# Altium PCB 新控制图.PcbDoc
Units mil, origin at the board's own origin, x right, y up, seen from the top; angles counter-clockwise.
Board outline 6000 x 4000 mil, 2 copper layers (Top Layer, Bottom Layer); 40 components, 61 nets, 219 pads, 43 vias.
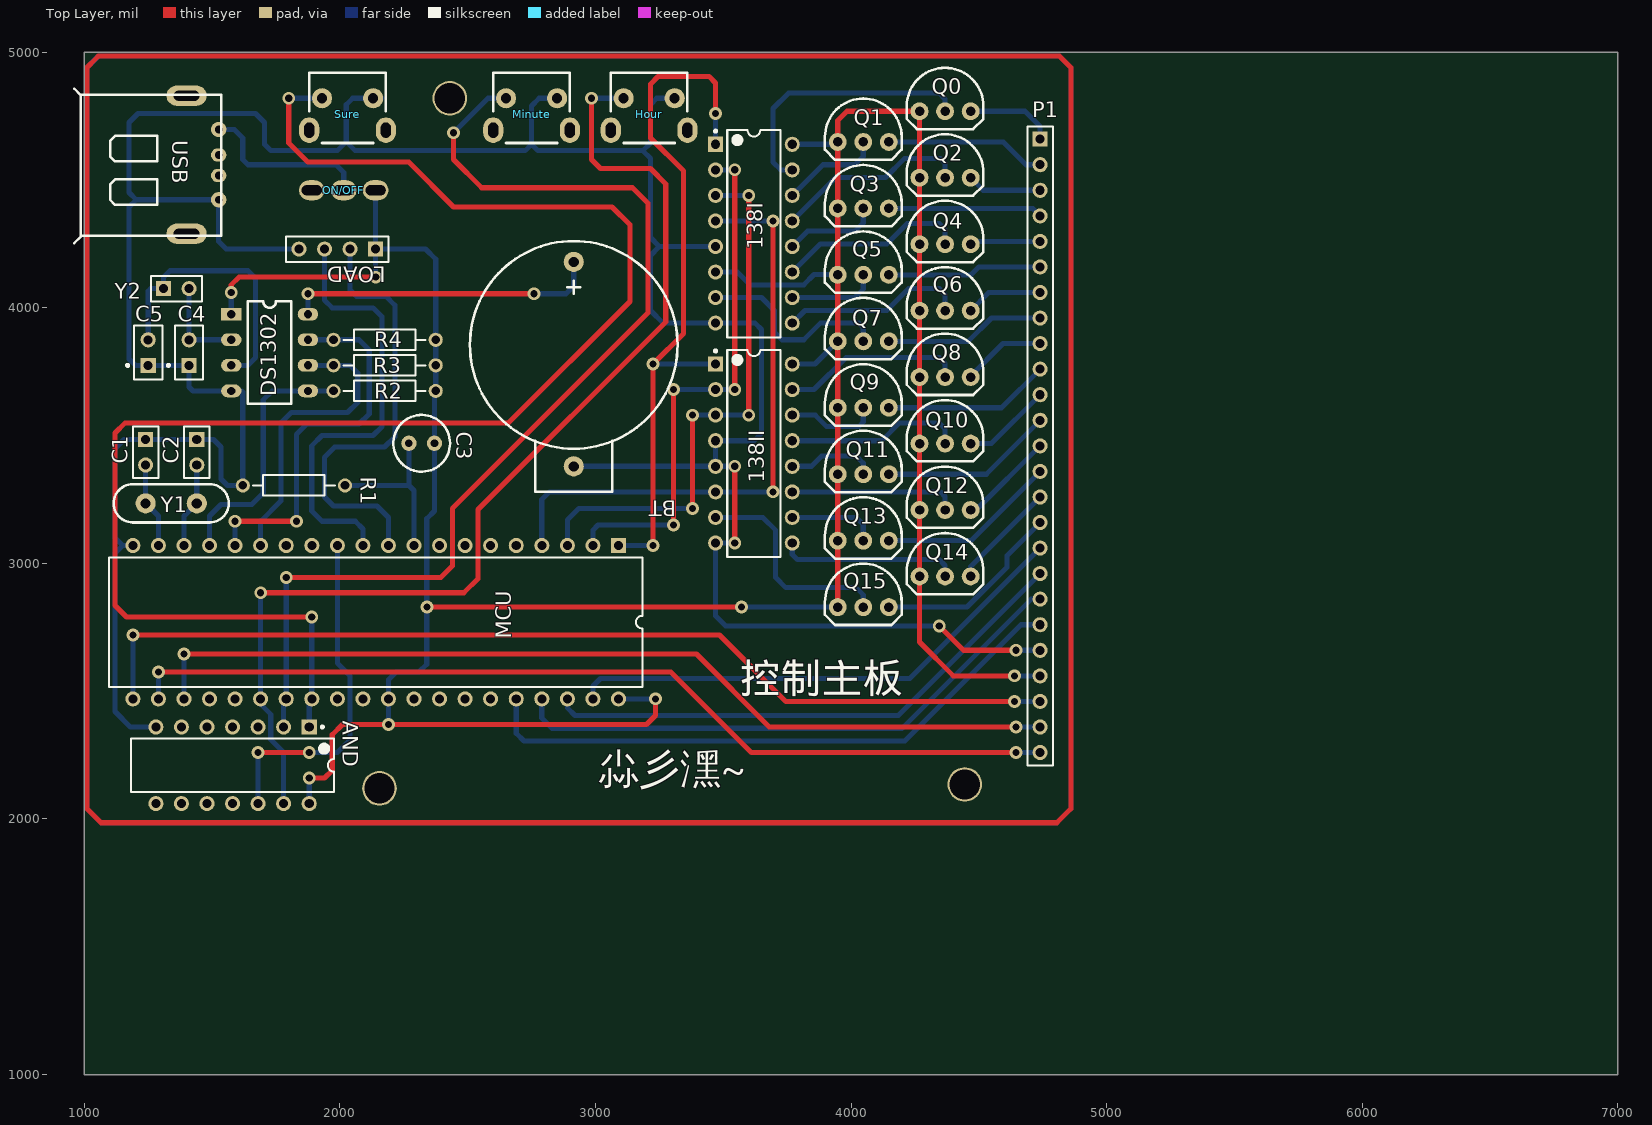
[diagram p0: Top Layer view]
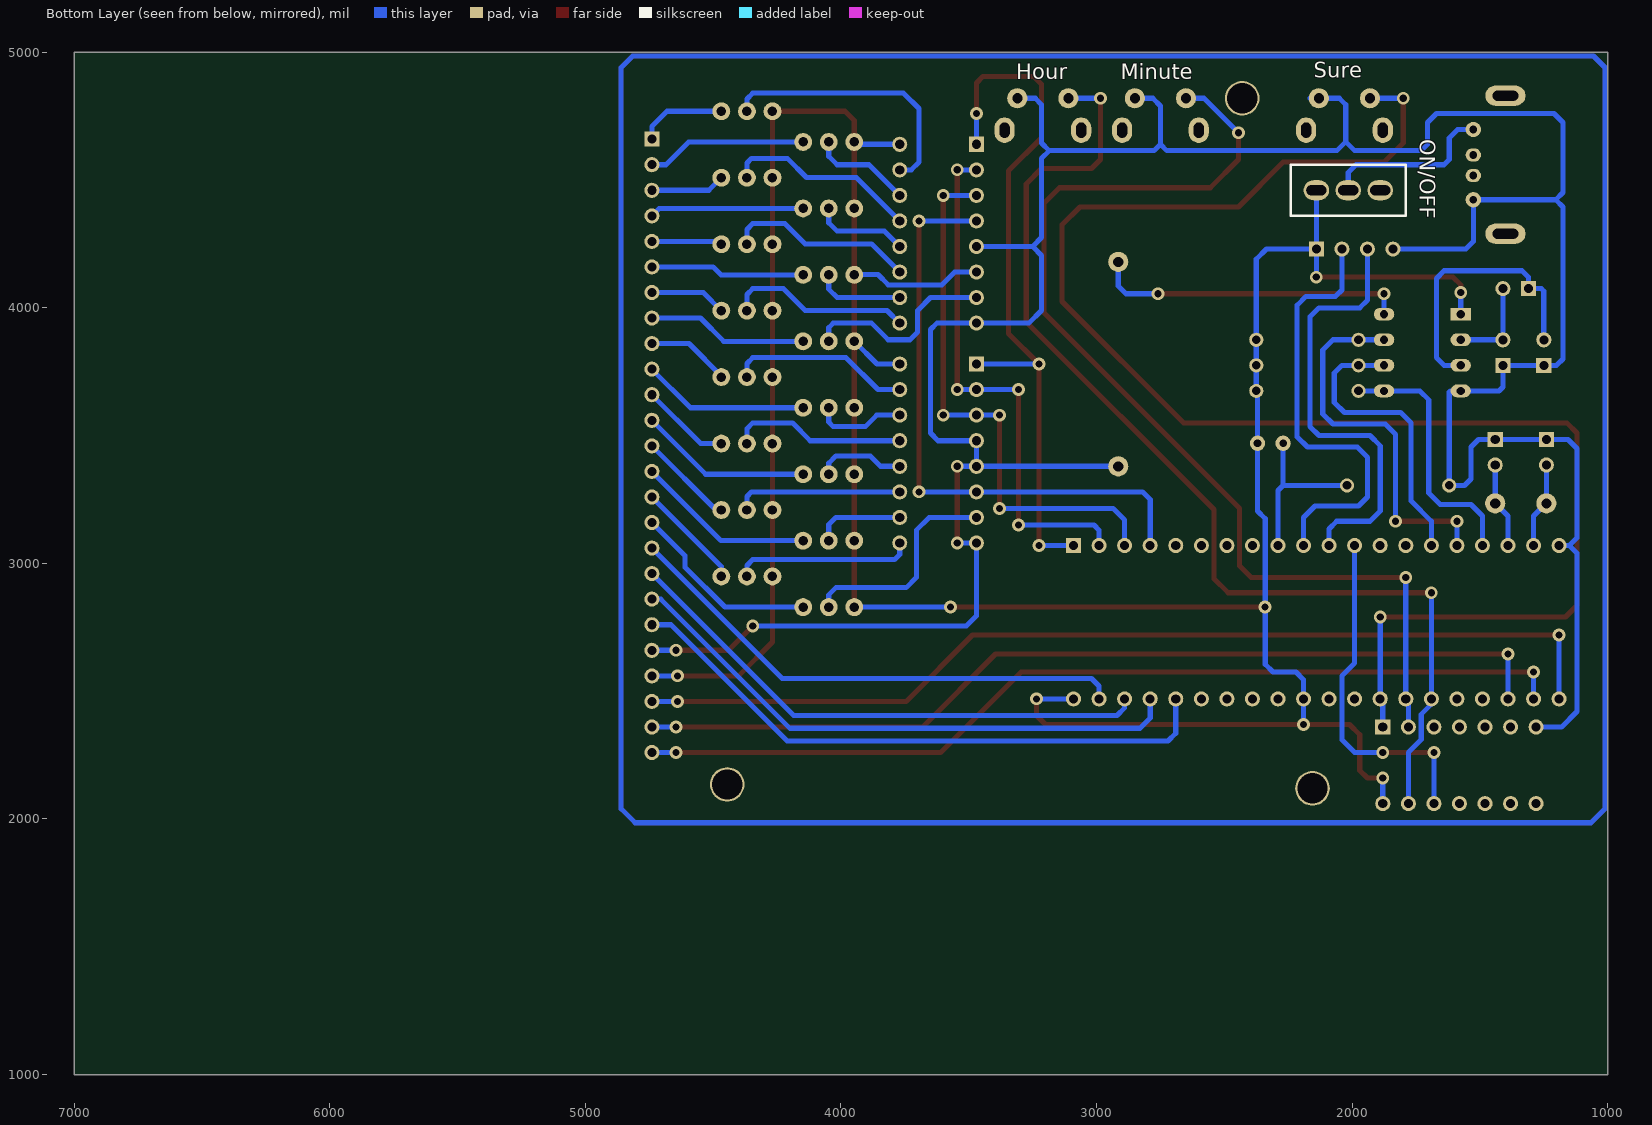
[diagram p1: Bottom Layer view, seen from below]

## Layer stack, top to bottom
Top Layer: signal copper 1.4
Dielectric: dielectric 12.6, FR-4, Dk 4.8
Bottom Layer: signal copper 1.4

## Board outline
1000,1000 7000,1000 7000,5000 1000,5000

## Design rules (kind name [scope] priority, off if disabled: settings)
Clearance [All] p1: gap=10
PolygonConnect [All] p1: connectstyle=Relief reliefconductorwidth=10 reliefentries=4 polygonreliefangle="90 Angle"
RoutingVias [All] p1: holewidth=28 width=50 viastyle="Through Hole" minholewidth=28 minwidth=50 maxholewidth=28 maxwidth=50
SilkscreenOverComponentPads [All] p1: minsilkscreentomaskgap=10
SolderMaskExpansion [All] p1: expansion=4
Width [All] p1: maxlimit=20 minlimit=20 preferedwidth=20 minimp=50.000000 maximp=50.000000 favimp=50.000000
27 further rules are at their usual default settings.

## Components (designator, comment, footprint, x,y, rotation, side; value= is the part's Value field where it differs from the comment)
138I "74ALS138" DIP-16 3620,4290 r0 top
138II "74ALS138" DIP-16 3620,3430 r0 top
AND "74LS11" DIP-14 1580,2210 r270 top
BT "" PCBComponent_1#1 2740,4430 r270 top
C1 "Cap" HDR1X2 1240,3485 r270 top
C2 "Cap" HDR1X2 1440,3485 r270 top
C3 "Cap Pol1" LED 2320,3470 r270 top
C4 "Cap" PIN2 1410,3775 r90 top
C5 "Cap" PIN2 1250,3775 r90 top
DS1302 "" DIP8 1575,3975 r0 top
Hour "" PCBComponent_1#2 2960,5020 r270 top
LOAD "Header 4" HDR1X4 2140,4230 r180 top
MCU "P80C31SBPN" SOT129-1 2140,2770 r180 top
Minute "" PCBComponent_1#2 2500,5020 r270 top
ON/OFF "" PCBComponent_1#3 2440,4710 r180 top
P1 "" HDR1X25 4740,4660 r270 top
Q0 "PNP" TO-92 4270,4675 r0 top
Q1 "PNP" TO-92 3950,4555 r0 top
Q2 "PNP" TO-92 4270,4415 r0 top
Q3 "PNP" TO-92 3950,4295 r0 top
Q4 "PNP" TO-92 4270,4155 r0 top
Q5 "PNP" TO-92 3950,4035 r0 top
Q6 "PNP" TO-92 4270,3895 r0 top
Q7 "PNP" TO-92 3950,3775 r0 top
Q8 "PNP" TO-92 4270,3635 r0 top
Q9 "PNP" TO-92 3950,3515 r0 top
Q10 "PNP" TO-92 4270,3375 r0 top
Q11 "PNP" TO-92 3950,3255 r0 top
Q12 "PNP" TO-92 4270,3115 r0 top
Q13 "PNP" TO-92 3950,2995 r0 top
Q14 "PNP" TO-92 4270,2855 r0 top
Q15 "PNP" TO-92 3950,2735 r0 top
R1 "Res2" AXIAL-0.4 1820,3305 r0 top
R2 "Res2" AXIAL-0.4 2175,3675 r180 top
R3 "Res2" AXIAL-0.4 2175,3775 r180 top
R4 "Res2" AXIAL-0.4 2175,3875 r180 top
Sure "" PCBComponent_1#2 1780,5020 r270 top
USB "USB_M" USB 1240,4550 r180 top
Y1 "XTAL" PCBComponent_1#4 1140,3585 r270 top
Y2 "XTAL" HDR1X2 1310,4075 r0 top

## Footprints (in the part's own frame and the unit in brackets; to place one, negate y for a bottom-side part, rotate by r counter-clockwise, add the part's x,y. Pads: shape width x height; smd on the part's side, far side on the other; paste and mask are expansions set on the pad)
AXIAL-0.4 [mm] "Axial Device, Thru-Hole; 2 Leads; 0.4 in Pin Spacing"
  round 1.4 hole 0.85: 1(-5.08,0) 2(5.08,0)
  silkscreen extent -4.06,-1.02 4.06,1.02
DIP8 [mil]
  rect 80x50 hole 32: 1(0,0)
  oval 80x50 hole 32: 2(0,-100) 3(0,-200) 4(0,-300) 5(300,-300) 6(300,-200) 7(300,-100) 8(300,0)
  silkscreen extent 65,-350 235,50
DIP-14 [mm] "DIP; 14 Leads; Row Spacing 7.62 mm; Pitch 2.54 mm"
  rect 1.5x1.5 hole 0.9: 1(-3.81,7.62)
  round 1.5 hole 0.9: 2(-3.81,5.08) 3(-3.81,2.54) 4(-3.81,0) 5(-3.81,-2.54) 6(-3.81,-5.08) 7(-3.81,-7.62) 8(3.81,-7.62) 9(3.81,-5.08) 10(3.81,-2.54) 11(3.81,0) 12(3.81,2.54) 13(3.81,5.08) 14(3.81,7.62)
  silkscreen extent -3.93,-10.1 2.65,10.1, body extent -3.6,-10.1 3.6,10.1, height 5.08
DIP-16 [mm] "DIP; 16 Leads; Row Spacing 7.62 mm; Pitch 2.54 mm"
  rect 1.5x1.5 hole 0.9: 1(-3.81,8.89)
  round 1.5 hole 0.9: 2(-3.81,6.35) 3(-3.81,3.81) 4(-3.81,1.27) 5(-3.81,-1.27) 6(-3.81,-3.81) 7(-3.81,-6.35) 8(-3.81,-8.89) 9(3.81,-8.89) 10(3.81,-6.35) 11(3.81,-3.81) 12(3.81,-1.27) 13(3.81,1.27) 14(3.81,3.81) 15(3.81,6.35) 16(3.81,8.89)
  silkscreen extent -3.93,-10.3 2.65,10.31, body extent -3.6,-10.28 3.6,10.28, height 5.08
HDR1X2 [mm] "Connector; Header; 2 Position"
  rect 1.5x1.5 hole 0.9: 1(0,0)
  round 1.5 hole 0.9: 2(2.54,0)
  silkscreen extent -1.27,-1.27 3.81,1.27
HDR1X4 [mm] "Connector; Header; 4 Position"
  rect 1.5x1.5 hole 0.9: 1(0,0)
  round 1.5 hole 0.9: 2(2.54,0) 3(5.08,0) 4(7.62,0)
  silkscreen extent -1.27,-1.27 8.89,1.27
HDR1X25 [mm] "Connector; Header; 25 Position"
  rect 1.5x1.5 hole 0.9: 1(0,0)
  round 1.5 hole 0.9: 2(2.54,0) 3(5.08,0) 4(7.62,0) 5(10.16,0) 6(12.7,0) 7(15.24,0) 8(17.78,0) 9(20.32,0) 10(22.86,0) 11(25.4,0) 12(27.94,0) 13(30.48,0) 14(33.02,0) 15(35.56,0) 16(38.1,0) 17(40.64,0) 18(43.18,0) 19(45.72,0) 20(48.26,0) 21(50.8,0) 22(53.34,0) 23(55.88,0) 24(58.42,0) 25(60.96,0)
  silkscreen extent -1.27,-1.27 62.23,1.27
LED [mil]
  round 60 hole 30: 1(0,50) 2(0,-50)
  silkscreen extent -111,-111 111,111
PCBComponent_1#1 [mm]
  round 2 hole 1: 1(6.35,4.445) 2(26.67,4.445)
  silkscreen extent 4.28,-5.88 29.21,14.77
PCBComponent_1#2 [mm]
  round 2 hole 1: 1(5.08,3.81) 3(5.08,8.89)
  oval 2.54x2 hole 1 slot 1.524 at 0 deg: 2(8.255,10.16) 4(8.255,2.54)
  silkscreen extent 2.54,2.54 9.53,10.16
PCBComponent_1#3 [mm]
  oval 2.54x2 hole 1 slot 1.981 at 0 deg: 0(7.62,6.35) 1(10.795,6.35) 2(13.97,6.35)
PCBComponent_1#4 [mm]
  round 2 hole 1: 1(8.89,7.62) 2(8.89,2.54)
  silkscreen extent 6.98,-0.63 10.79,10.8
PIN2 [mm] "Photosensitive Diode; 2 Leads"
  rect 1.5x1.5 hole 0.9: 1(0,0)
  round 1.5 hole 0.9: 2(2.54,0)
  silkscreen extent -1.4,-1.4 3.94,2.17
SOT129-1 [mm] "DIP, Plastic; 40 Leads; Row Spacing 15.24 mm; Pitch 2.54 mm"
  rect 1.5x1.5 hole 0.9: 1(-24.13,-7.62)
  round 1.5 hole 0.9: 2(-21.59,-7.62) 3(-19.05,-7.62) 4(-16.51,-7.62) 5(-13.97,-7.62) 6(-11.43,-7.62) 7(-8.89,-7.62) 8(-6.35,-7.62) 9(-3.81,-7.62) 10(-1.27,-7.62) 11(1.27,-7.62) 12(3.81,-7.62) 13(6.35,-7.62) 14(8.89,-7.62) 15(11.43,-7.62) 16(13.97,-7.62) 17(16.51,-7.62) 18(19.05,-7.62) 19(21.59,-7.62) 20(24.13,-7.62) 21(24.13,7.62) 22(21.59,7.62) 23(19.05,7.62) 24(16.51,7.62) 25(13.97,7.62) 26(11.43,7.62) 27(8.89,7.62) 28(6.35,7.62) 29(3.81,7.62) 30(1.27,7.62) 31(-1.27,7.62) 32(-3.81,7.62) 33(-6.35,7.62) 34(-8.89,7.62) 35(-11.43,7.62) 36(-13.97,7.62) 37(-16.51,7.62) 38(-19.05,7.62) 39(-21.59,7.62) 40(-24.13,7.62)
  silkscreen extent -26.5,-6.45 26.5,6.45
TO-92 [mil]
  round 70 hole 37: B(98,94) C(198,94) E(-2,94)
  silkscreen extent -52,24 248,264
USB [mil]
  round 60 hole 30: 1(-285.63,-147.91) 4(-285.63,127.09)
  oval 60x52.13 hole 30: 2(-285.63,-47.91) 3(-285.63,32.09)
  oval 157.48x78.74 hole 39.37 slot 100 at 0 deg: ""(-160,260) ""(-160,-280)
  silkscreen extent -296,-308 279,297

## Part data
BT: library part 干电池, "Battery"
C1 C2 C4 C5: "Capacitor"
C3: "Polarized Capacitor (Radial)"
DS1302 Hour Minute ON/OFF Sure: library part Component_1
LOAD: "Header, 4-Pin"
MCU: "80C51 8-Bit Microcontroller Family: 128 B RAM, ROMless, 2.7 V-5.5 V, Low Power, High Speed"
P1: library part "Header 25", "Header, 25-Pin"
R1 R2 R3 R4: "Resistor"
Y1 Y2: "Crystal Oscillator"

## Free pads (board coordinates)
  round 135.22 hole 118.11: 0(4445,2135) 7(2430,4820) 8(2155,2120)

## Via types
v1: diameter 50, hole 28, Top Layer to Bottom Layer, 43 vias

## Nets (pads, with @x,y where several pads share a name; then routed paths per layer and width w, separated by ;. In a path a pad name is that pad's centre, name@x,y a point inside that pad or via, vN(x,y) a via of type N, cw(c..) or ccw(c..) an arc to the next point about the centre after c; other vN are vias at no path point)
A: 138I.1 138II.1 MCU.1 | length 2806.3
  Top Layer w20: v1(3225,3070) v1(3225,3780) 3345,3900 3345,4535 3215,4665 3215,4875 3245,4905 3445,4905 3470,4880 v1(3470,4760)
  Bottom Layer w20: MCU.1 v1(3225,3070) ; v1(3225,3780) 138II.1 ; 138I.1 v1(3470,4760)
B: 138I.2 138II.2 MCU.2 | length 2088.3
  Top Layer w20: v1(3305,3150) v1(3305,3680) ; v1(3545,3680) v1(3545,4540)
  Bottom Layer w20: MCU.2 2990,3130 3010,3150 v1(3305,3150) ; v1(3305,3680) 138II.2 v1(3545,3680) ; 138I.2 v1(3545,4540)
B0: 138I.15 Q0.B | length 1052.8
  Bottom Layer w20: 138I.15 3725,4540 3695,4570 3695,4780 3755,4840 4345,4840 4368,4817 Q0.B
B1: 138I.14 Q1.B | length 397.4
  Bottom Layer w20: 138I.14 3890,4560 4015,4560 4048,4593 Q1.B
B2: 138I.13 Q2.B | length 764.9
  Bottom Layer w20: 138I.13 3940,4510 4135,4510 4210,4585 4350,4585 4368,4567 Q2.B
B3: 138I.12 Q3.B | length 372.5
  Bottom Layer w20: 138I.12 3830,4300 4015,4300 4048,4333 Q3.B
B4: 138I.11 Q4.B | length 744.2
  Bottom Layer w20: 138I.11 3880,4250 4140,4250 4220,4330 4345,4330 4368,4307 Q4.B
B5: 138I.10 Q5.B | length 347.7
  Bottom Layer w20: 138I.10 4015,4040 4048,4073 Q5.B
B6: 138I.9 Q6.B | length 726.4
  Bottom Layer w20: 138I.9 3820,3990 4140,3990 4225,4075 4345,4075 4368,4052 Q6.B
B7: 138I.7 Q7.B | length 783.5
  Bottom Layer w20: 138I.7 3650,4040 3700,3990 3700,3905 3730,3875 3815,3875 3880,3940 4030,3940 4048,3922 Q7.B
B8: 138II.15 Q8.B | length 712.3
  Bottom Layer w20: 138II.15 3855,3680 3980,3805 4345,3805 4368,3782 Q8.B
B9: 138II.14 Q9.B | length 360.1
  Bottom Layer w20: 138II.14 3860,3580 3905,3535 4030,3535 4048,3553 Q9.B
B10: 138II.13 Q10.B | length 694.5
  Bottom Layer w20: 138II.13 4120,3480 4190,3550 4345,3550 4368,3527 Q10.B
B11: 138II.12 Q11.B | length 349.2
  Bottom Layer w20: 138II.12 3845,3380 3885,3420 4020,3420 4048,3392 Q11.B
B12: 138II.11 Q12.B | length 658.5
  Bottom Layer w20: 138II.11 4350,3280 4368,3262 Q12.B
B13: 138II.10 Q13.B | length 352.6
  Bottom Layer w20: 138II.10 4020,3180 4048,3152 Q13.B
B14: 138II.9 Q14.B | length 703.8
  Bottom Layer w20: 138II.9 3770,3035 3790,3015 4345,3015 4368,2992 Q14.B
B15: 138II.7 Q15.B | length 859.9
  Bottom Layer w20: 138II.7 3655,3180 3705,3130 3705,2945 3745,2905 4020,2905 4048,2877 Q15.B
C: 138I.3 138II.3 MCU.3 | length 2183.6
  Top Layer w20: v1(3380,3215) v1(3380,3580) ; v1(3600,3580) v1(3600,4440)
  Bottom Layer w20: MCU.3 2890,3170 2935,3215 v1(3380,3215) ; v1(3380,3580) 138II.3 v1(3600,3580) ; 138I.3 v1(3600,4440)
CLK: MCU.22 P1.25 | length 3693.8
  Top Layer w20: v1(1290,2575) 3295,2575 3610,2260 4625,2260 4635,2270 v1(4645,2260)
  Bottom Layer w20: MCU.22 v1(1290,2575) ; v1(4645,2260) P1.25
D: 138I.4 138II.6 MCU.4 | length 2382.4
  Top Layer w20: v1(3695,3280) v1(3695,4340)
  Bottom Layer w20: MCU.4 2790,3250 2820,3280 138II.6 v1(3695,3280) ; 138I.4 v1(3695,4340)
GND: 138I.5 138I.8 138II.4 138II.5 138II.8 AND.7 BT.2 C1.1 C2.1 C4.1 C5.1 DS1302.4 Hour.3 LOAD.4 MCU.20 Minute.3 P1.21 R1.1 Sure.3 USB.4 | length 12317.4
  Top Layer w20: v1(3545,3080) v1(3545,3380) ; v1(4345,2755) 4440,2660 v1(4645,2660)
  Bottom Layer w20: MCU.20 1150,3070 ; AND.7 1180,2360 1120,2420 1120,3040 1150,3070 ; LOAD.4 1555,4230 1525.63,4259.37 USB.4 1202.91,4422.91 ; Sure.3 2050,4820 2025,4795 2025,4650 ; Sure.3@2140,4795 Sure.3@2165,4820 ; Minute.3 2780,4820 2750,4790 2750,4640 ; BT.2 138II.5 ; Hour.3 3240,4820 3215,4795 3215,4645 3185,4615 ; 138I.5 3250,4240 ; v1(3545,3080) 138II.8 3470,2795 3510,2755 v1(4345,2755) ; v1(3545,3380) 138II.5 ; v1(4645,2660) P1.21@4735,2660 ; 1150,3070 1120,3100 1120,3450 1155,3485 C1.1 C2.1 1505,3485 1535,3455 1535,3330 1560,3305 R1.1 1620,3670 1615,3675 DS1302.4 1425,3675 1410,3690 C4.1 C5.1 1200,3775 1175,3800 1175,4395 1202.91,4422.91 ; 1202.91,4422.91 1175,4450.83 1175,4725 1210,4760 1670,4760 1705,4725 1705,4640 1730,4615 1990,4615 2025,4650 ; 2025,4650 2060,4615 2725,4615 2750,4640 ; 2750,4640 2775,4615 3185,4615 ; 3185,4615 3215,4585 3215,4275 3250,4240 ; 3250,4240 3215,4205 3215,3990 3265,3940 138I.8 3625,3940 3650,3915 3650,3510 3620,3480 138II.4 138II.5
K0: P1.1 Q0.C | length 346.4
  Bottom Layer w20: Q0.C 4681,4769 4740,4710 P1.1
K1: P1.2 Q1.C | length 628.9
  Bottom Layer w20: Q1.C 4596,4649 4685,4560 P1.2
K2: P1.3 Q2.C | length 296.4
  Bottom Layer w20: Q2.C 4517,4460 4730,4460 P1.3@4740,4470
K3: P1.4 Q3.C | length 604
  Bottom Layer w20: Q3.C 4711,4389 P1.4
K4: P1.5 Q4.C | length 276.6
  Bottom Layer w20: Q4.C 4479,4260 P1.5
K5: P1.6 Q5.C | length 604.8
  Bottom Layer w20: Q5.C 4469,4129 4500,4160 P1.6
K6: P1.7 Q6.C | length 301.4
  Bottom Layer w20: Q6.C 4539,4060 P1.7
K7: P1.8 Q7.C | length 629.7
  Bottom Layer w20: Q7.C 4459,3869 4550,3960 P1.8
K8: P1.9 Q8.C | length 328.6
  Bottom Layer w20: Q8.C 4468,3733 4595,3860 P1.9
K9: P1.10 Q9.C | length 654.5
  Bottom Layer w20: Q9.C 4589,3609 P1.10
K10: P1.11 Q10.C | length 382.1
  Bottom Layer w20: Q10.C@4499,3469 Q10.C 4549,3469 P1.11
K11: P1.12 Q11.C | length 679.4
  Bottom Layer w20: Q11.C 4529,3349 P1.12
K12: P1.13 Q12.C | length 376
  Bottom Layer w20: Q12.C 4489,3209 P1.13
K13: P1.14 Q13.C | length 704.3
  Bottom Layer w20: Q13.C 4469,3089 P1.14
K14: P1.15 Q14.C | length 423.7
  Bottom Layer w20: Q14.C 4468,2988 P1.15
K15: P1.16 Q15.C | length 755.5
  Bottom Layer w20: Q15.C 4454,2829 4610,2985 4610,3030 P1.16
L1: MCU.37 P1.19 | length 2250.7
  Bottom Layer w20: MCU.37 2790,2395 2830,2355 4200,2355 4705,2860 P1.19
L2: MCU.38 P1.18 | length 2127.3
  Bottom Layer w20: MCU.38 2890,2435 2920,2405 4185,2405 P1.18
L3: MCU.39 P1.17 | length 2023.7
  Bottom Layer w20: MCU.39 2990,2520 3020,2550 4230,2550 P1.17
L4: MCU.36 P1.20 | length 2385.9
  Bottom Layer w20: MCU.36 2690,2335 2720,2305 4210,2305 4665,2760 P1.20
NetBT_1: BT.1 DS1302.8 | length 1227.4
  Top Layer w20: v1(1875,4055) v1(2760,4055)
  Bottom Layer w20: DS1302.8 v1(1875,4055) ; v1(2760,4055) 2885,4055 2915,4085 BT.1
NetC4_2: C4.2 DS1302.2 Y2.2 | length 340
  Bottom Layer w20: C4.2 Y2.2 ; C4.2@1435,3875 DS1302.2
NetC5_2: C5.2 DS1302.3 Y2.1 | length 1099.4
  Bottom Layer w20: C5.2 1250,4065 1260,4075 Y2.1 1310,4120 1335,4145 1640,4145 1670,4115 1670,3805 1640,3775 DS1302.3
NetON/OFF_1: ON/OFF.1 USB.1 | length 678.7
  Bottom Layer w20: USB.1 1587.09,4697.91 1620,4665 1620,4580 1640,4560 1985,4560 2015,4530 ON/OFF.1
P9: C3.2 MCU.9 R1.2 | length 658.3
  Bottom Layer w20: R1.2 2270,3305 ; C3.2 2270,3305 ; MCU.9 2290,3285 2270,3305
P12: AND.12 MCU.12 | length 1413.8
  Top Layer w20: v1(1680,2260) v1(1880,2260) ; v1(1880,2260) 1875,2260 1875,2270 v1(1880,2260)
  Bottom Layer w20: AND.12 v1(1680,2260) ; MCU.12 1990,2610 2040,2560 2040,2310 1990,2260 1895,2260 v1(1880,2260) ; v1(1880,2260) 1875,2260 1875,2270 v1(1880,2260)
P18: C2.2 MCU.18 Y1.1 | length 335.7
  Bottom Layer w20: MCU.18 1390,3185 Y1.1 C2.2
P19: C1.2 MCU.19 Y1.2 | length 335.7
  Bottom Layer w20: C1.2 Y1.2 1290,3185 MCU.19
P26: AND.13 Hour.1 MCU.26 | length 4300.1
  Top Layer w20: v1(1690,2885) 2485,2885 2540,2940 2540,3045 2540.47,3045.47 2540.47,3210.47 3275,3945 3275,4485 3215,4545 3020,4545 2985,4580 2985,4805 v1@2970,4820
  Bottom Layer w20: v1(1690,2885) MCU.26 1690,2449.06 1729.53,2409.53 1729.53,2310.47 1780,2260 AND.13 ; v1@2970,4820 Hour.1
  other v1: 2985,4820
P27: AND.2 MCU.27 Minute.1 | length 4176.8
  Top Layer w20: v1(1790,2945) 2395,2945 2440.47,2990.47 2440.47,3215.47 3205,3980 3205,4410 3145,4470 2555,4470 2445,4580 v1(2445,4685)
  Bottom Layer w20: AND.2 MCU.27@1780,2460 ; MCU.27 v1(1790,2945) ; v1(2445,4685) 2580,4820 Minute.1
P28: AND.1 MCU.28 Sure.1 | length 6189.5
  Top Layer w20: v1@1800,4830 v1(1800,4820) 1800,4645 1875,4570 2270,4570 2445,4395 3065,4395 3135,4325 3135,4025 2660,3550 1160,3550 1120,3510 1120,2835 1165,2790 v1(1890,2790)
  Bottom Layer w20: v1(1800,4820) Sure.1@1925,4820 ; AND.1 MCU.28@1880,2460 ; MCU.28 v1(1890,2790)
P31: 138I.6 138I.16 138II.16 AND.14 C3.1 DS1302.1 LOAD.1 MCU.31 MCU.40 ON/OFF.0 P1.22 Q0.E Q1.E Q2.E Q3.E Q4.E Q5.E Q6.E Q7.E Q8.E Q9.E Q10.E Q11.E Q12.E Q13.E Q14.E Q15.E R2.1 R3.1 R4.1 | length 12417.5
  Top Layer w20: v1(1575,4060) 1575,4090 1605,4120 v1(2140,4120) ; v1(1880,2160) 1940,2160 1970,2190 1970,2330 2010,2370 v1(2190,2370) 3200,2370 3235,2405 v1(3235,2470) ; v1(2341,2829) v1(3571,2829) ; Q15.E Q13.E Q11.E Q9.E Q7.E Q5.E Q3.E Q1.E 3948,4733 3984,4769 Q0.E Q2.E Q4.E Q6.E Q8.E Q10.E Q12.E Q14.E 4268,2692 4400,2560 v1(4640,2560)
  Bottom Layer w20: DS1302.1 v1(1575,4060) ; AND.14 v1(1880,2160) ; v1(2140,4120) LOAD.1 ; ON/OFF.0 LOAD.1 ; v1(2190,2370) MCU.31 2190,2545 2220,2575 2310,2575 2340,2605 2340,3175 2370,3205 C3.1 R2.1@2370,3670 ; R2.1 R3.1 R4.1 2375,4190 2335,4230 LOAD.1 ; MCU.40 v1(3235,2470) ; 138I.6 3555,4140 3605,4090 3815,4090 3855,4130 Q5.E@3947,4130 ; v1(3571,2829) Q15.E ; 138II.16 3859,3780 Q7.E ; 138I.16 Q1.E@3939,4640 ; v1(4640,2560) P1.22@4735,2560
R1: MCU.21 P1.23 | length 3902.7
  Top Layer w20: v1(1190,2720) 3485,2720 3745,2460 v1(4640,2460)
  Bottom Layer w20: MCU.21 v1(1190,2720) ; v1(4640,2460) P1.23@4735,2460
RST: DS1302.5 MCU.17 R2.2 | length 1016.8
  Bottom Layer w20: MCU.17 1490,3185 1535,3230 1655,3230 1700,3275 1700,3640 1735,3675 DS1302.5 R2.2
RXD: LOAD.2 MCU.10 | length 1731.1
  Bottom Layer w20: LOAD.2 2040,4070 2065,4045 2180,4045 2215,4010 2215,3495 2175,3455 1980,3455 1940,3415 1940,3260 1975,3225 2145,3225 2190,3180 MCU.10
SCLK: DS1302.7 MCU.16 R4.2 | length 1499.7
  Top Layer w20: v1(1590,3165) v1(1830,3165)
  Bottom Layer w20: MCU.16 v1(1590,3165) ; v1(1830,3165) 1830,3505 1870,3545 2075,3545 2115,3585 2115,3835 2075,3875 R4.2 DS1302.7
SDA: DS1302.6 MCU.15 R3.2 | length 1168.7
  Bottom Layer w20: MCU.15 1690,3165 1770,3245 1770,3550 1810,3590 2030,3590 2070,3630 2070,3745 2040,3775 R3.2 DS1302.6
STB: MCU.23 P1.24 | length 3643.1
  Top Layer w20: v1(1390,2645) 3395,2645 3680,2360 v1(4645,2360)
  Bottom Layer w20: MCU.23 v1(1390,2645) ; v1(4645,2360) P1.24
TXD: LOAD.3 MCU.11 | length 1737
  Bottom Layer w20: LOAD.3 1940,4030 1970,4000 2130,4000 2165,3965 2165,3535 2130,3500 1930,3500 1890,3460 1890,3205 1930,3165 2060,3165 2090,3135 MCU.11
pads on no net: AND.3 AND.4 AND.5 AND.6 AND.8 AND.9 AND.10 AND.11 Hour.2 Hour.4 MCU.5 MCU.6 MCU.7 MCU.8 MCU.13 MCU.14 MCU.24 MCU.25 MCU.29 MCU.30 MCU.32 MCU.33 MCU.34 MCU.35 Minute.2 Minute.4 ON/OFF.2 Sure.2 Sure.4 USB. USB.2 USB.3
copper on no net: | length 27165.7
  Top Layer w20: 1010,2040 1065,1985 4805,1985 4860,2040 4860,4940 4815,4985 1055,4985 1045,4975 1010,4940 1010,2040
  Bottom Layer w20: 1010,2040 1065,1985 1880,1985 4805,1985 4860,2040 4860,4940 4815,4985 1055,4985 1010,4940 1010,2040

## Silkscreen, mask and mechanical layers (free items; w line width, h text height)
Top Overlay:
  text "控制主板" at 3565,2455 h200
  text "尛彡潶~" at 3010,2100 h200